# Altium PCB m1.PcbDoc
Units mm, origin at the board's own origin, x right, y up, seen from the top; angles counter-clockwise.
Board outline 38.48 x 58.55 mm, 2 copper layers (Top Layer, Bottom Layer); 18 components, 9 nets, 49 pads, 0 vias.
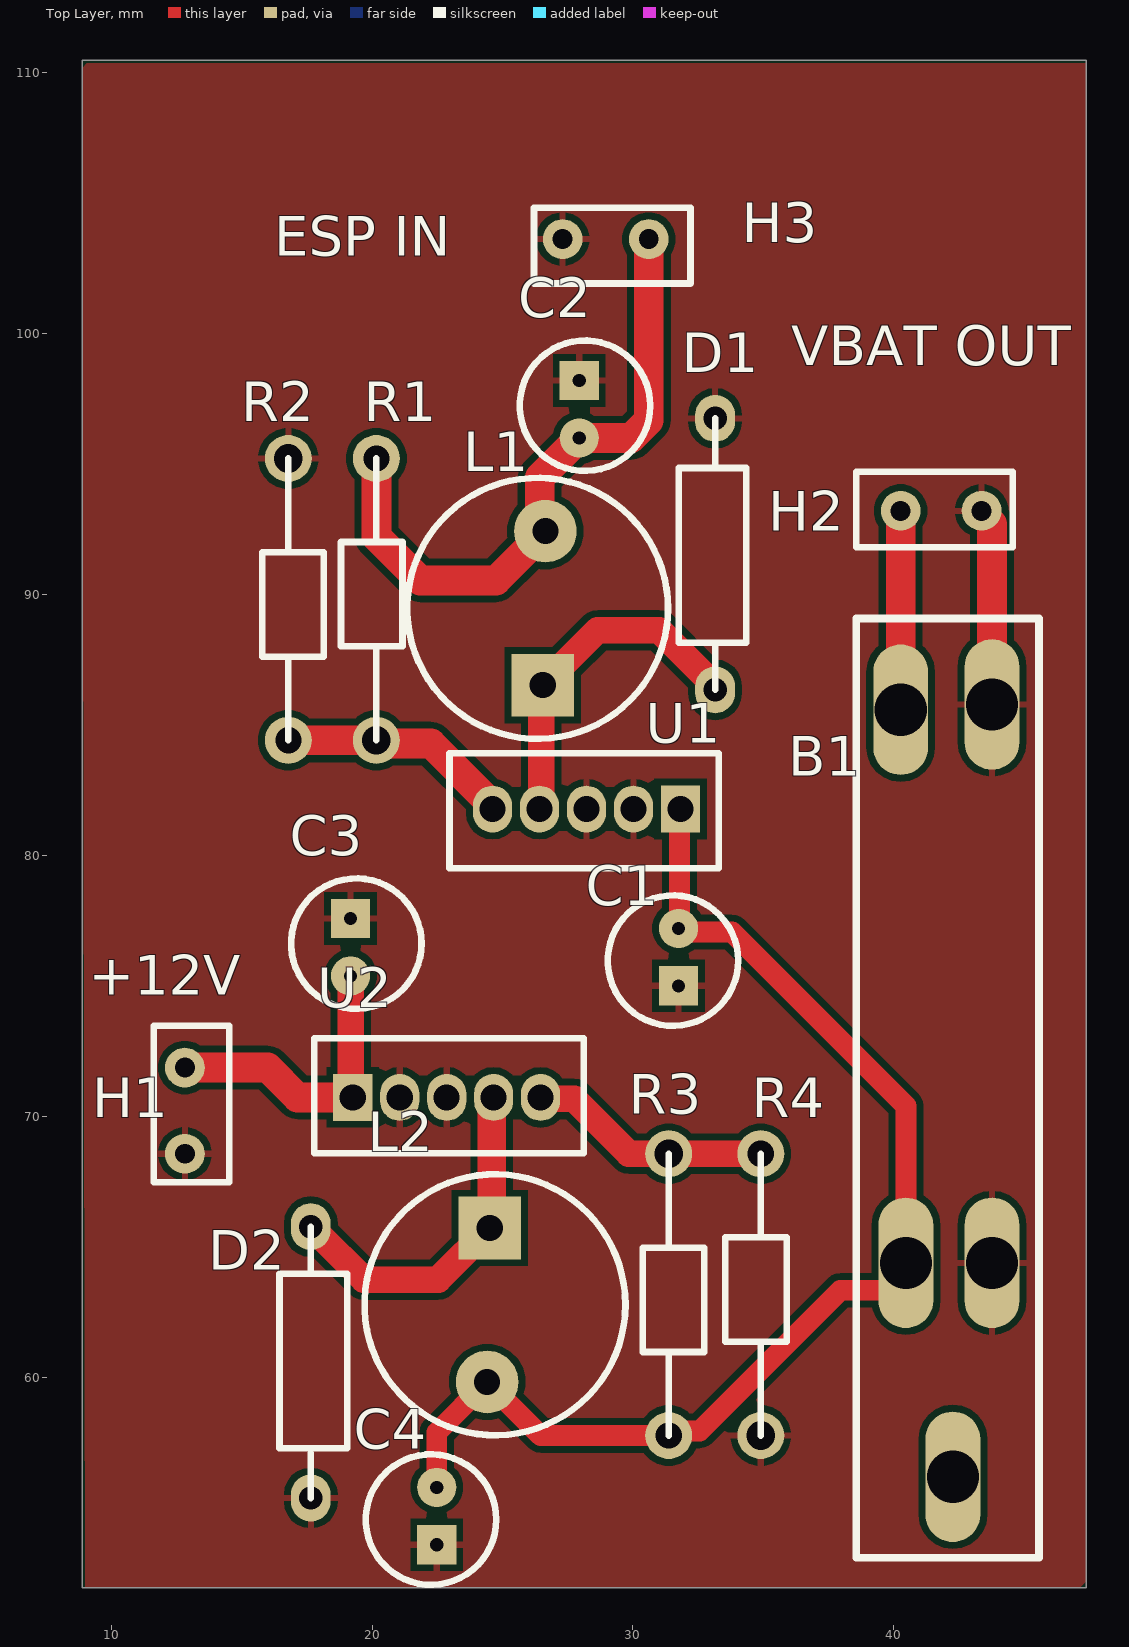
[diagram p0: Top Layer view]
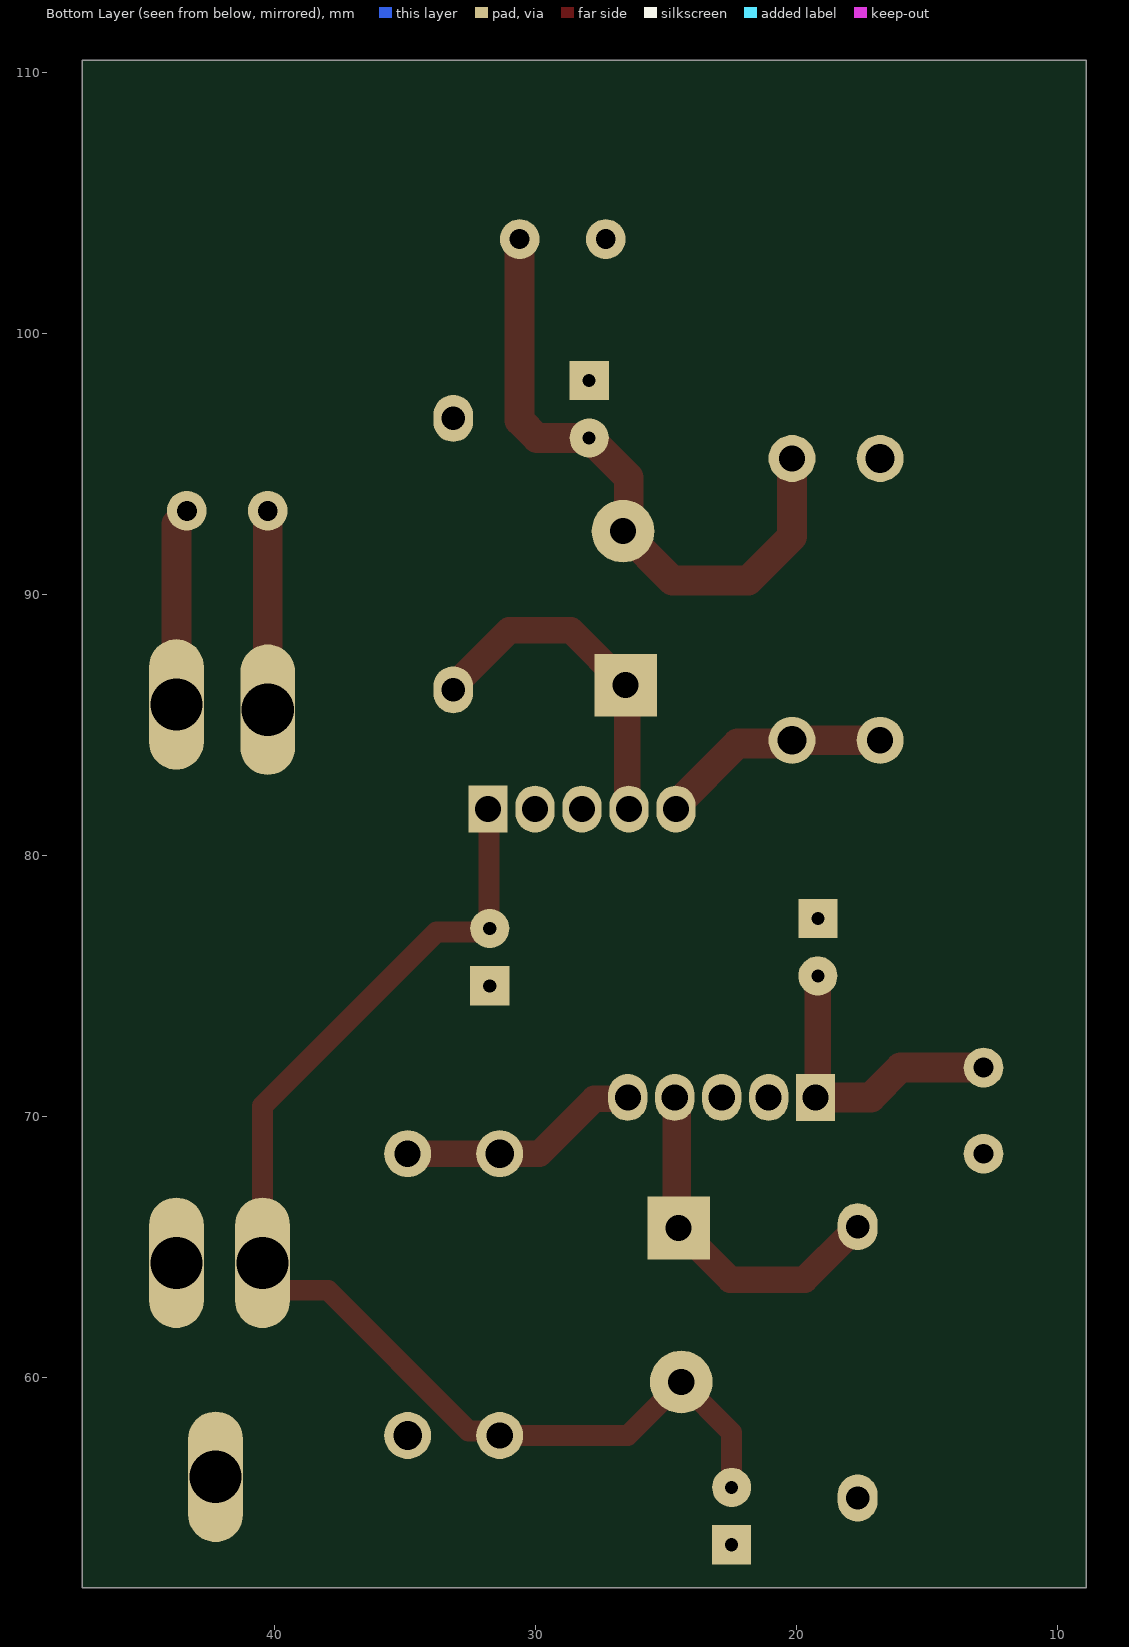
[diagram p1: Bottom Layer view, seen from below]
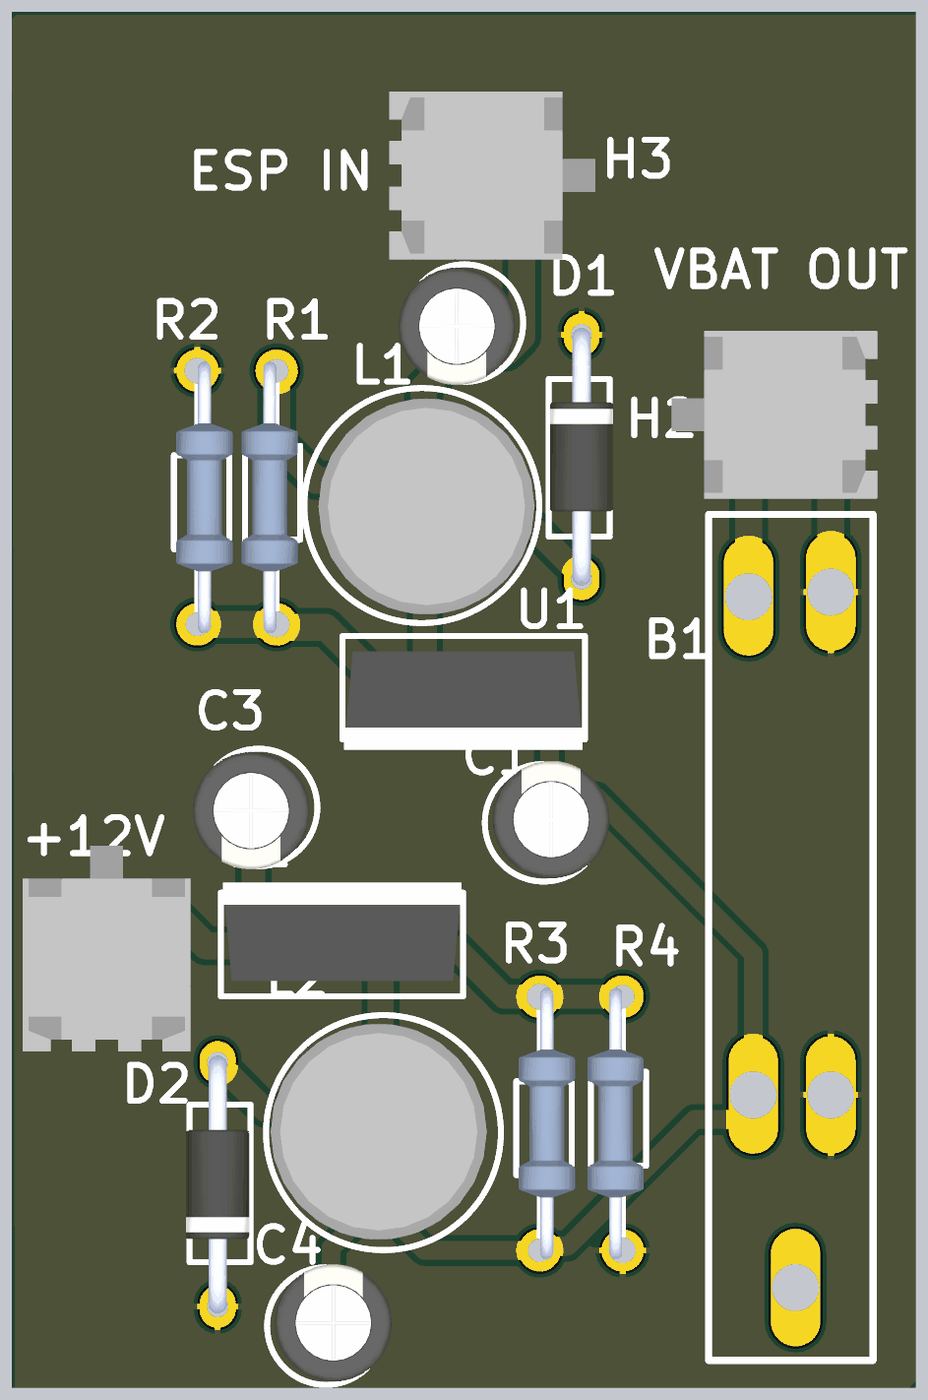
[diagram p2: 3D render of the assembled board from above, using the file's embedded part models]

## Layer stack, top to bottom
Top Solder: solder mask 0.0102, Solder Resist, Dk 3.5
Top Layer: signal copper 0.0356
Dielectric 1: dielectric 0.32, FR-4, Dk 4.8
Bottom Layer: signal copper 0.0356
Bottom Solder: solder mask 0.0102, Solder Resist, Dk 3.5

## Board outline
8.89,51.943 47.371,51.943 47.371,110.49 8.89,110.49

## Design rules (kind name [scope] priority, off if disabled: settings)
Clearance Clearance_1 [All] p1: gap=0.254 ignorepadtopadclearanceinfootprint=FALSE
Clearance [All] p2: gap=0.762 ignorepadtopadclearanceinfootprint=FALSE
PolygonConnect [All] p1: connectstyle=Relief reliefconductorwidth=0.254 reliefentries=4 polygonreliefangle="90 Angle" airgapwidth=0.254
RoutingVias [All] p1: holewidth=0.711 width=1.27 viastyle="Through Hole" minholewidth=0.711 minwidth=1.27 maxholewidth=0.711 maxwidth=1.27
SolderMaskExpansion [All] p1: expansion=0.102 istentingtop=FALSE
SupplyNets "Schematic Supply Nets_5" [InNet('V BMS')] p1: voltage=0.000
SupplyNets "Schematic Supply Nets_3" [InNet('+12V')] p2: voltage=0.000
SupplyNets "Schematic Supply Nets_2" [InNet('VBAT')] p3: voltage=0.000
SupplyNets "Schematic Supply Nets_4" [InNet('OUT +5')] p4: voltage=0.000
SupplyNets "Schematic Supply Nets" [InNet('GND')] p5: voltage=0.000
Width [All] p1: maxlimit=2.54 minlimit=0.254 preferedwidth=1.143 minimp=50.000000 maximp=50.000000 favimp=50.000000
30 further rules are at their usual default settings.

## Components (designator, comment, footprint, x,y, rotation, side; value= is the part's Value field where it differs from the comment)
B1 "BMS" BMS 42.259,56.198 r90 top
C1 "120UF" CAPACITOR 31.75,75.016 r90 top
C2 "100UF" CAPACITOR 27.94,98.212 r270 top
C3 "120UF" CAPACITOR 19.177,77.597 r270 top
C4 "100UF" CAPACITOR 22.479,53.594 r90 top
D1 "Diode" DIODE 33.147,96.76 r270 top
D2 "Diode" DIODE 17.653,55.386 r90 top
H1 "Header" HEADER#1 12.827,71.88 r270 top
H2 "Header" HEADER#2 40.259,93.218 r0 top
H3 "Header" HEADER#1 30.605,103.632 r180 top
L1 "100uH" INDUCTOR 26.543,86.741 r90 top
L2 "100uH" INDUCTOR 24.511,65.532 r270 top
R1 "1.2K" RESISTOR 20.066,85.725 r90 top
R2 "3.7K" RESISTOR 16.891,93.925 r270 top
R3 "10K" RESISTOR 31.469,67.28 r270 top
R4 "7K" RESISTOR 34.798,59.08 r90 top
U1 "LM2596" LM2595 31.816,81.788 r180 top
U2 "LM2596" LM2595 19.26,70.739 r0 top

## Footprints (in the part's own frame and the unit in brackets; to place one, negate y for a bottom-side part, rotate by r counter-clockwise, add the part's x,y. Pads: shape width x height; smd on the part's side, far side on the other; paste and mask are expansions set on the pad)
BMS [mm]
  oval 5x2.1 hole 2 paste-2539.97: 1(0,0) 2(8.2,1.8) 3(8.2,-1.5) 4(29.4,2) 5(29.6,-1.5)
  silkscreen extent -3.1,-3.3 32.9,3.7
CAPACITOR [mm]
  rect 1.5x1.5 hole 0.5: 1(0,0)
  round 1.5 hole 0.5: 2(2.2,0)
  silkscreen extent -1.53,-2.28 3.46,2.72, body extent -1.4,-2.6 3.6,2.4, height 11
DIODE [mm]
  oval 1.8x1.524 hole 0.9: 1(0,0) 2(10.4,0)
  silkscreen extent 0,-1.4 10.4,1.2, body extent -0.27,-1.35 10.67,1.35, height 2.68
HEADER#1 [mil]
  round 60 hole 30: 1(0,0) 2(129.92,0)
  silkscreen extent -63,-47 173,67, body extent -123,-137 222,145, height 431
HEADER#2 [mil]
  round 60 hole 30: 1(0,0) 2(122.05,0)
  silkscreen extent -67,-55 169,59, body extent -129,-136 216,146, height 431
INDUCTOR [mm]
  rect 2.4x2.4 hole 1: 1(-0.2,0)
  round 2.4 hole 1: 2(5.7,-0.1)
  silkscreen extent -2.26,-4.8 7.74,5.2, body extent -1.9,-4.6 7.3,4.6, height 11
LM2595 [mm]
  rect 1.5x1.8 hole 1: 1(0,0)
  oval 1.5x1.8 hole 1: 2(1.8,0) 3(3.6,0) 4(5.4,0) 5(7.2,0)
  silkscreen extent -1.47,-2.14 8.85,2.26, body extent -1.38,-1.49 8.78,2.7, height 16.51
RESISTOR [mm]
  round 1.8 all layers, no hole: 1(-1.3,-0.1)
  round 0.6 hole 1.1: 1(-1.3,-0.1)
  round 1.8 hole 1: 2(9.5,-0.1)
  silkscreen extent -1.3,-1.1 9.5,1.26, body extent -1.68,-1 9.88,1.4, height 2.39

## Part data
C1 C2 C3 C4: library part Capacitor
L1 L2: library part Inductor
R1 R2 R3 R4: library part Resistor

## Nets (pads, with @x,y where several pads share a name; then routed paths per layer and width w, separated by ;. In a path a pad name is that pad's centre, name@x,y a point inside that pad or via, vN(x,y) a via of type N, cw(c..) or ccw(c..) an arc to the next point about the centre after c; other vN are vias at no path point)
+12V: C3.2 H1.1 U2.1 | length 11.6
  Top Layer w1.016: C3.2 19.177,70.822 U2.1
  Top Layer w1.143: H1.1 16.004,71.88 17.145,70.739 U2.1
GND: B1.3 B1.5 C1.1 C2.1 C3.1 C4.1 D1.1 D2.1 H1.2 H2.2 H3.2 R2.1 R4.1 U1.2 U1.3 U2.2 U2.3 | length 7.6
  Top Layer w1.143: H2.2 43.359,93.115 43.759,92.715 B1.5
NetD1_2: D1.2 L1.1 U1.4 | length 13.3
  Top Layer w1.016: U1.4 26.479,81.852 26.479,86.478 L1.1 28.648,88.646 30.999,88.646 33.147,86.498 D1.2
NetD2_2: D2.2 L2.1 U2.4 | length 13.6
  Top Layer w1.016: D2.2 17.888,65.551 19.685,63.754 22.533,63.754 L2.1@24.585,65.806 ; U2.4@24.585,70.664 U2.4
  Top Layer w1.1: L2.1@24.585,65.806 U2.4@24.585,70.664
NetR1_1: R1.1 R2.2 U1.5 | length 9
  Top Layer w1.143: R2.2 20.166,84.425 20.292,84.299 22.255,84.299 24.616,81.938 U1.5
NetR3_1: R3.1 R4.2 U2.5 | length 9.5
  Top Layer w1.016: U2.5 26.514,70.685 27.74,70.685 29.845,68.58 34.536,68.58 R4.2@34.898,68.218
"Out +5": C2.2 H3.1 L1.2 R1.2 | length 25.1
  Top Layer w1.143: R1.2 20.166,92.229 21.844,90.551 24.753,90.551 L1.2 26.424,92.66 26.424,94.496 C2.2 29.935,96.012 30.605,96.682 H3.1
"V BMS": B1.2 C1.2 C4.2 L2.2 R3.2 U1.1 | length 47.1
  Top Layer w0.8: C4.2@22.29,55.794 C4.2 22.479,57.9 L2.2 26.463,57.78 R3.2 31.548,57.959 32.559,57.959 37.948,63.348 39.858,63.348 40.459,63.949 B1.2 40.459,70.412 33.789,77.082 31.884,77.082 C1.2 31.783,77.249 31.783,81.755 U1.1
VBAT: B1.4 H2.1 | length 7.6
  Top Layer w1.143: B1.4 H2.1
pads on no net: B1.1

## Polygon pours and split planes (outlines as drawn)
GND on Top Layer "GND_L01_P000" (solid, pour order 0): 8.89,110.363 47.371,110.363 47.371,52.197 47.117,51.943 9.017,51.943

## Silkscreen, mask and mechanical layers (free items; w line width, h text height)
Top Overlay:
  text "ESP IN" at 16.256,102.997 h1.52
  text "VBAT OUT" at 36.068,98.806 h1.52
  text "+12V" at 9.144,74.676 h1.52